# Altium PCB GIT_TEST.PcbDoc
Units mil, origin at the board's own origin, x right, y up, seen from the top; angles counter-clockwise.
Board outline 6000 x 4000 mil, 2 copper layers (Top Layer, Bottom Layer); 10 components, 13 nets, 38 pads, 0 vias.
Unrouted connection lines stored in the file: 13.
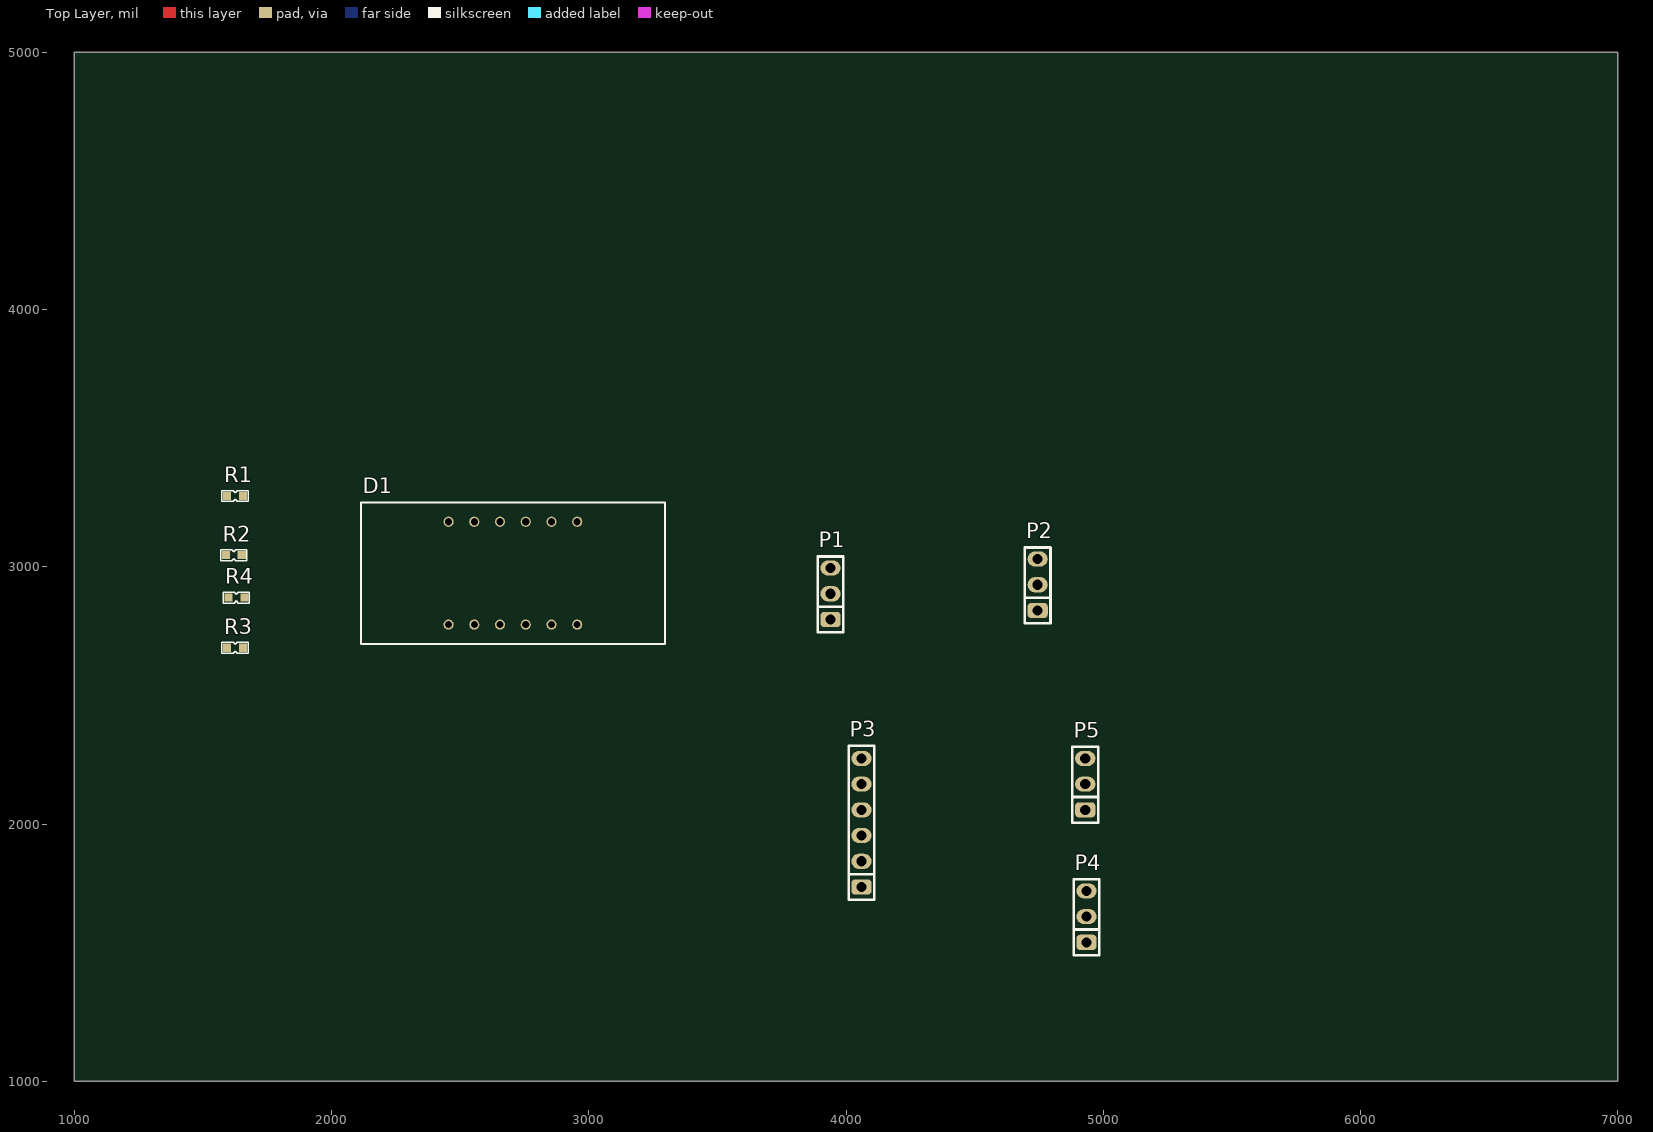
[diagram p0: Top Layer view]
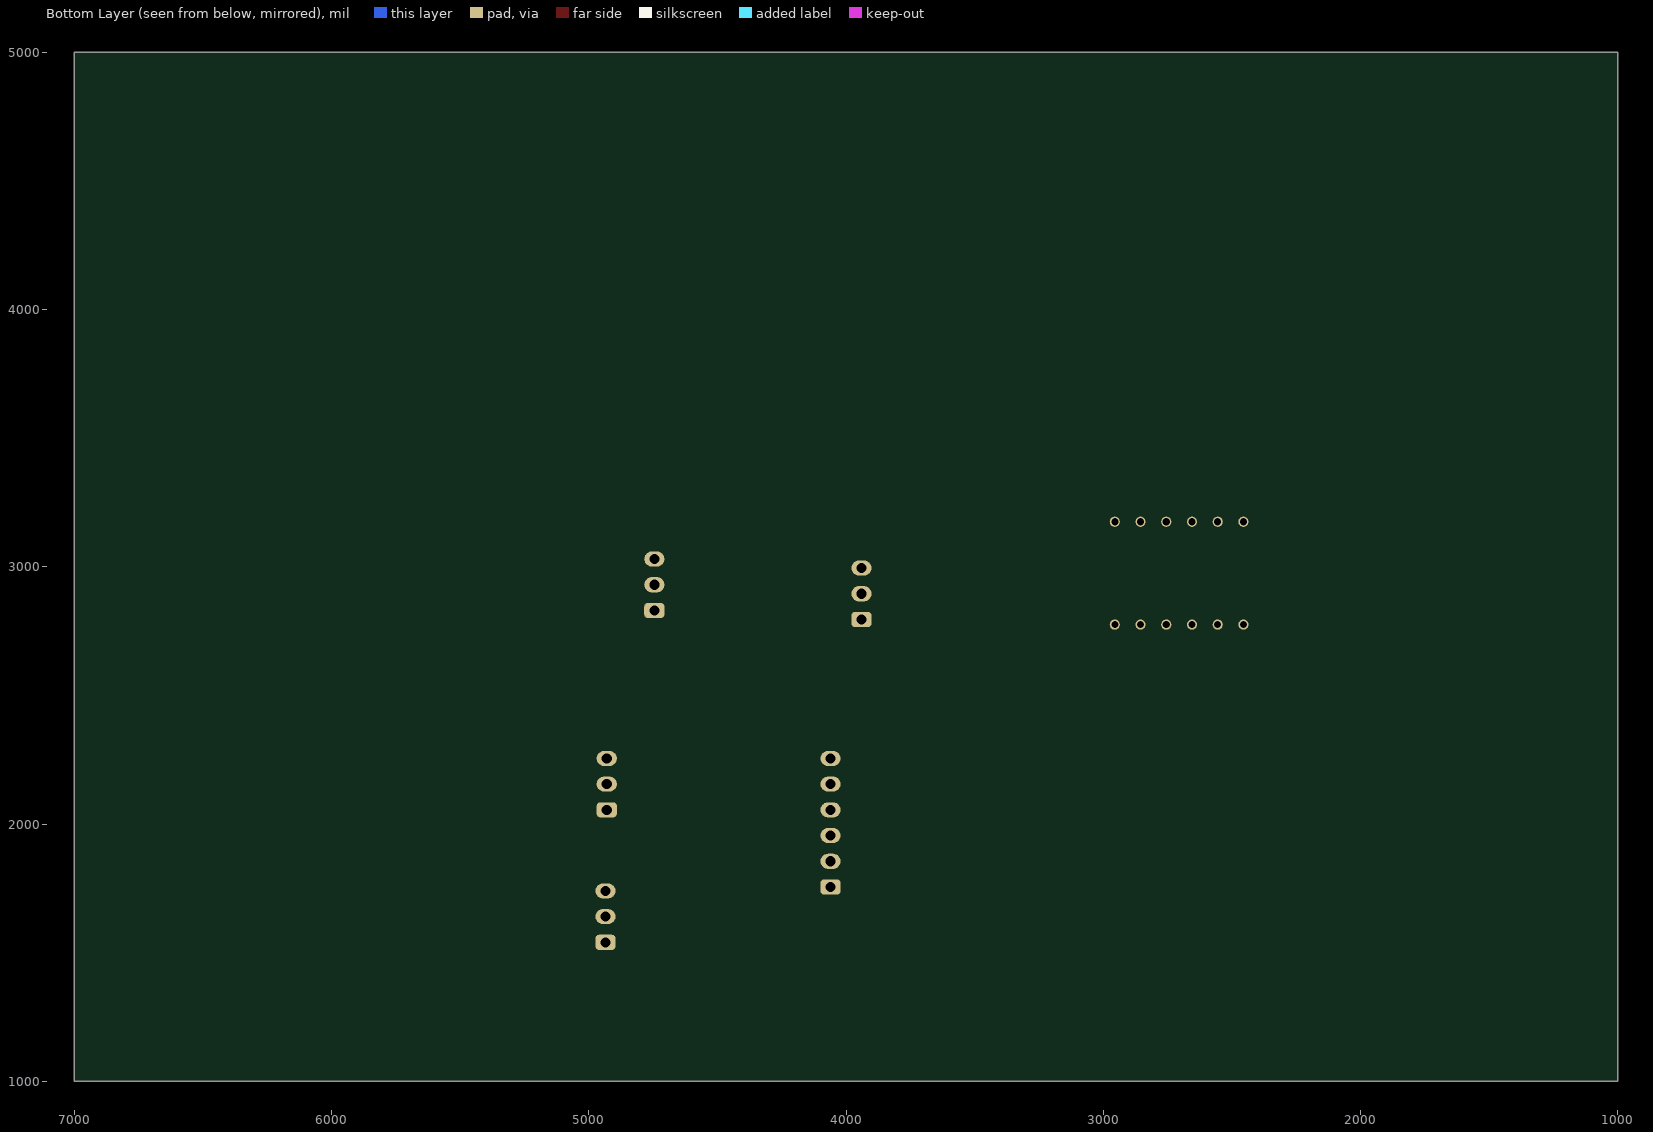
[diagram p1: Bottom Layer view, seen from below]

## Layer stack, top to bottom
Top Solder: solder mask 0.4, Solder Resist, Dk 3.5
Top Layer: signal copper 1.4
Dielectric 1: dielectric 12.6, FR-4, Dk 4.8
Bottom Layer: signal copper 1.4
Bottom Solder: solder mask 0.4, Solder Resist, Dk 3.5

## Board outline
1000,1000 7000,1000 7000,5000 1000,5000

## Design rules (kind name [scope] priority, off if disabled: settings)
Clearance [All] p1: gap=10 ignorepadtopadclearanceinfootprint=FALSE
PolygonConnect [All] p1: connectstyle=Relief reliefconductorwidth=10 reliefentries=4 polygonreliefangle="90 Angle" airgapwidth=10
RoutingVias [All] p1: holewidth=28 width=50 viastyle="Through Hole" minholewidth=28 minwidth=50 maxholewidth=28 maxwidth=50
SolderMaskExpansion [All] p1: expansion=4 istentingtop=FALSE
Width [All] p1: maxlimit=10 minlimit=10 preferedwidth=10
30 further rules are at their usual default settings.

## Components (designator, comment, footprint, x,y, rotation, side; value= is the part's Value field where it differs from the comment)
D1 "4Digit-FND-0.36" 4Digit-FND-0.36 2705,2975 r0 top
P1 "Servor" PIN3 3940,2795 r90 top
P2 "Servor" PIN3 4745,2830 r90 top
P3 "HEADER-6" PIN6 4060,1755 r90 top
P4 "Servor" PIN3 4935,1540 r90 top
P5 "Servor" PIN3 4930,2055 r90 top
R1 "50" 0603R1608 1625,3275 r0 top
R2 "50" 0603R1608 1620,3045 r0 top
R3 "50" 0603R1608 1625,2685 r0 top
R4 "50" 0603R1608 1630,2880 r0 top

## Footprints (in the part's own frame and the unit in brackets; to place one, negate y for a bottom-side part, rotate by r counter-clockwise, add the part's x,y. Pads: shape width x height; smd on the part's side, far side on the other; paste and mask are expansions set on the pad)
4Digit-FND-0.36 [mm]
  round 1 hole 0.7: 1(-6.35,-5.08) 2(-3.81,-5.08) 3(-1.27,-5.08) 4(1.27,-5.08) 5(3.81,-5.08) 6(6.35,-5.08) 7(6.35,5.08) 8(3.81,5.08) 9(1.27,5.08) 10(-1.27,5.08) 11(-3.81,5.08) 12(-6.35,5.08)
  silkscreen extent -15,-7 15,7, body extent -15,-7 15,7, height 7.2
0603R1608 [mm]
  rect 0.8x0.8 smd: 1(-0.787,0) 2(0.787,0)
  silkscreen extent -1.3,-0.53 1.3,0.53, body extent -0.8,-0.39 0.8,0.41, height 0.3
PIN3 [mm]
  rrect50% 1.5x2 hole 1: 1(0,0)
  oval 1.5x2 hole 1: 2(2.54,0) 3(5.08,0)
  silkscreen extent -1.27,-1.27 6.22,1.27, body extent -1.27,-1.27 6.35,1.27, height 8.43
PIN6 [mm]
  rrect50% 1.5x2 hole 1: 1(0,0)
  oval 1.5x2 hole 1: 2(2.54,0) 3(5.08,0) 4(7.62,0) 5(10.16,0) 6(12.7,0)
  silkscreen extent -1.27,-1.27 13.97,1.27, body extent -1.27,-1.27 13.97,1.27, height 8.43

## Part data
P1 P2 P4 P5: library part HEADER-3, "Connector"
P3: "Connector"
R1 R2 R3 R4: library part Res1_1, "Resistor", LatestRevisionDate=17-Jul-2002, LatestRevisionNote="Re-released for DXP Platform.", PackageDescription="Axial Device, Thru-Hole; 2 Leads; 0.3 in Pin Spacing", PackageReference=AXIAL-0.3, Published=8-Jun-2000, Publisher="Altium Limited"

## Nets (pads, with @x,y where several pads share a name; then routed paths per layer and width w, separated by ;. In a path a pad name is that pad's centre, name@x,y a point inside that pad or via, vN(x,y) a via of type N, cw(c..) or ccw(c..) an arc to the next point about the centre after c; other vN are vias at no path point)
NetD1_6: D1.6 R2.1
NetD1_8: D1.8 R4.1
NetD1_9: D1.9 R1.1
NetD1_12: D1.12 R3.1
NetP1_1: P1.1 P2.1
NetP1_2: P1.2 P2.2
NetP1_3: P1.3 P2.3
NetP3_1: P3.1 P4.1
NetP3_2: P3.2 P4.2
NetP3_3: P3.3 P4.3
NetP3_4: P3.4 P5.1
NetP3_5: P3.5 P5.2
NetP3_6: P3.6 P5.3
pads on no net: D1.1 D1.2 D1.3 D1.4 D1.5 D1.7 D1.10 D1.11 R1.2 R2.2 R3.2 R4.2